# Altium PCB PCB1.PcbDoc
Units mil, origin at the board's own origin, x right, y up, seen from the top; angles counter-clockwise.
Board outline 3865 x 2015 mil, 2 copper layers (Top Layer, Bottom Layer); 19 components, 16 nets, 53 pads, 0 vias.
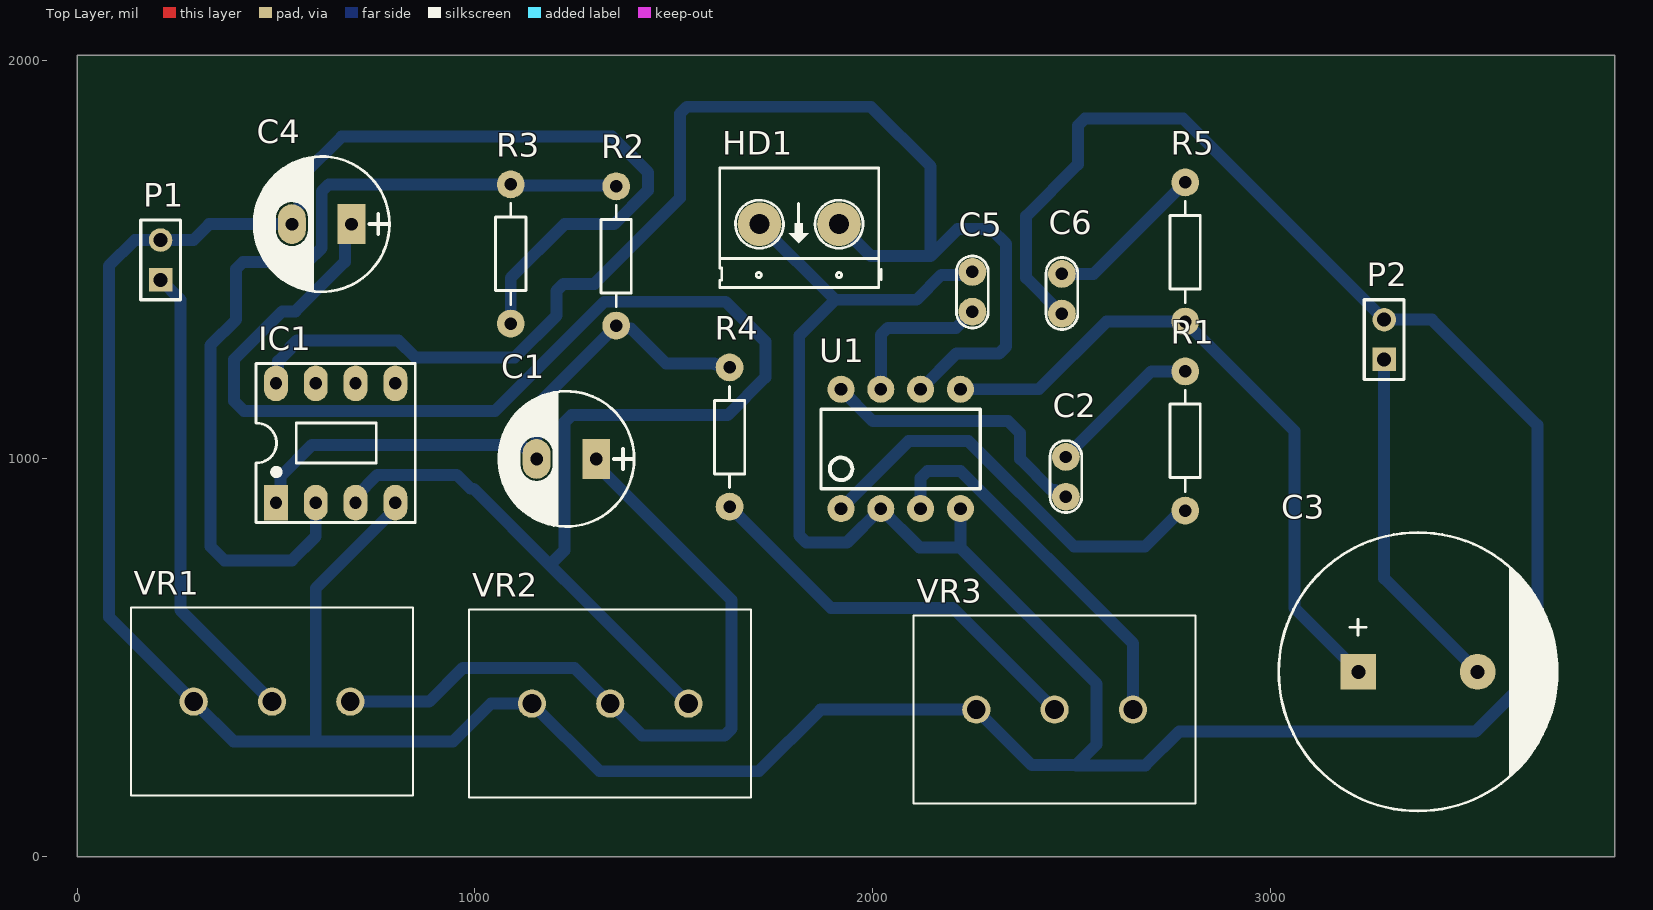
[diagram p0: Top Layer view]
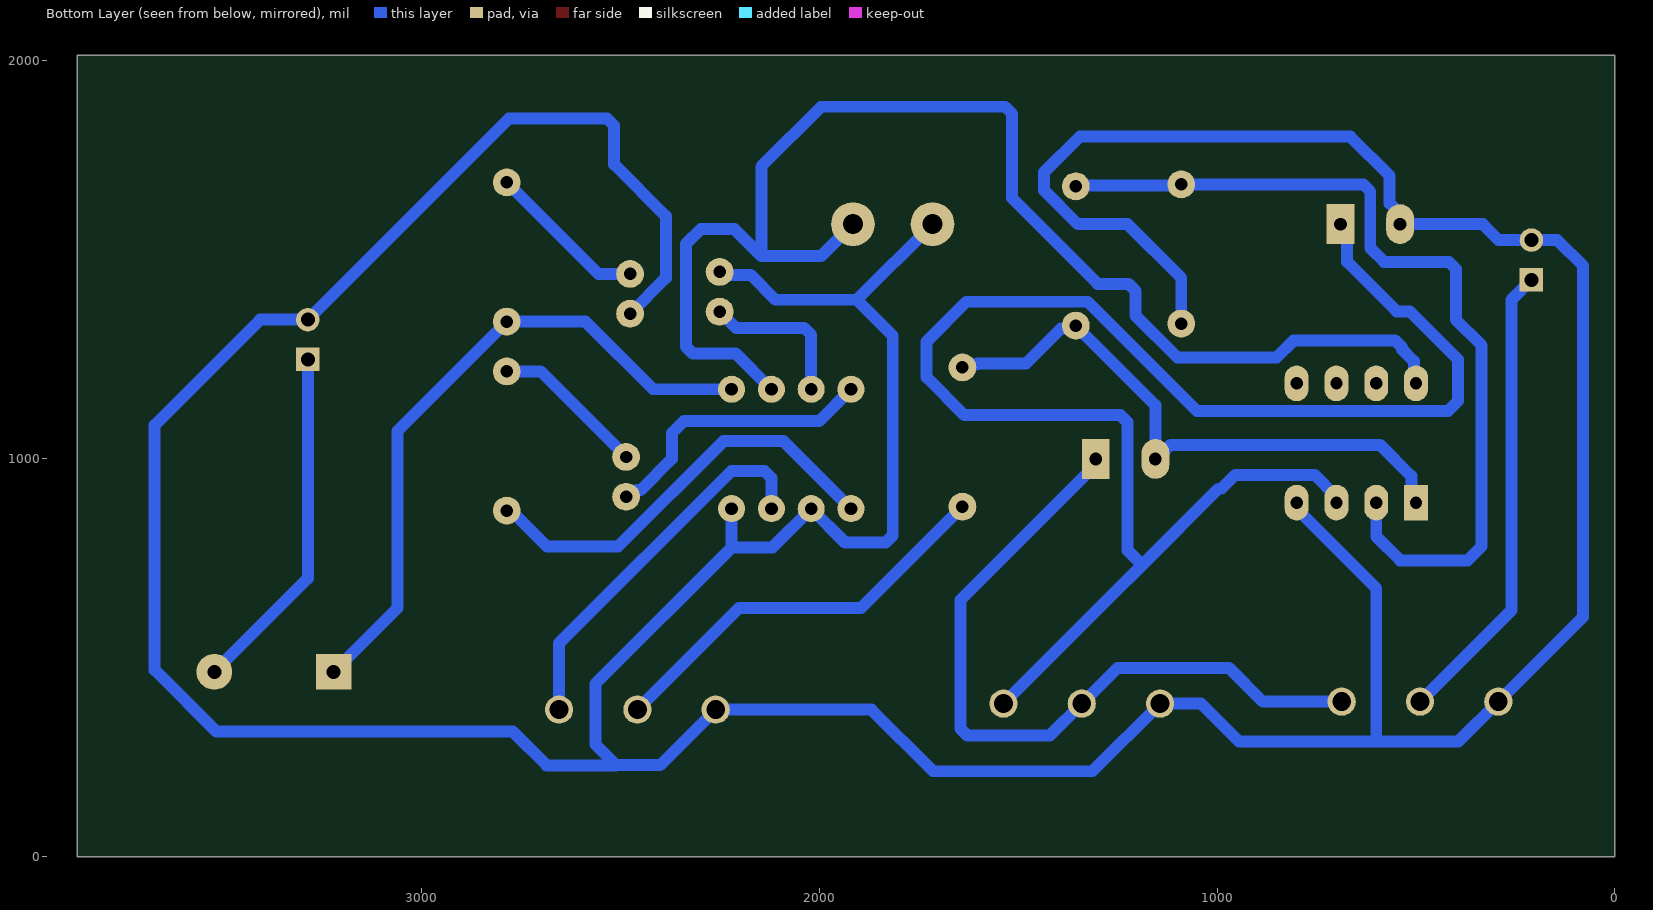
[diagram p1: Bottom Layer view, seen from below]
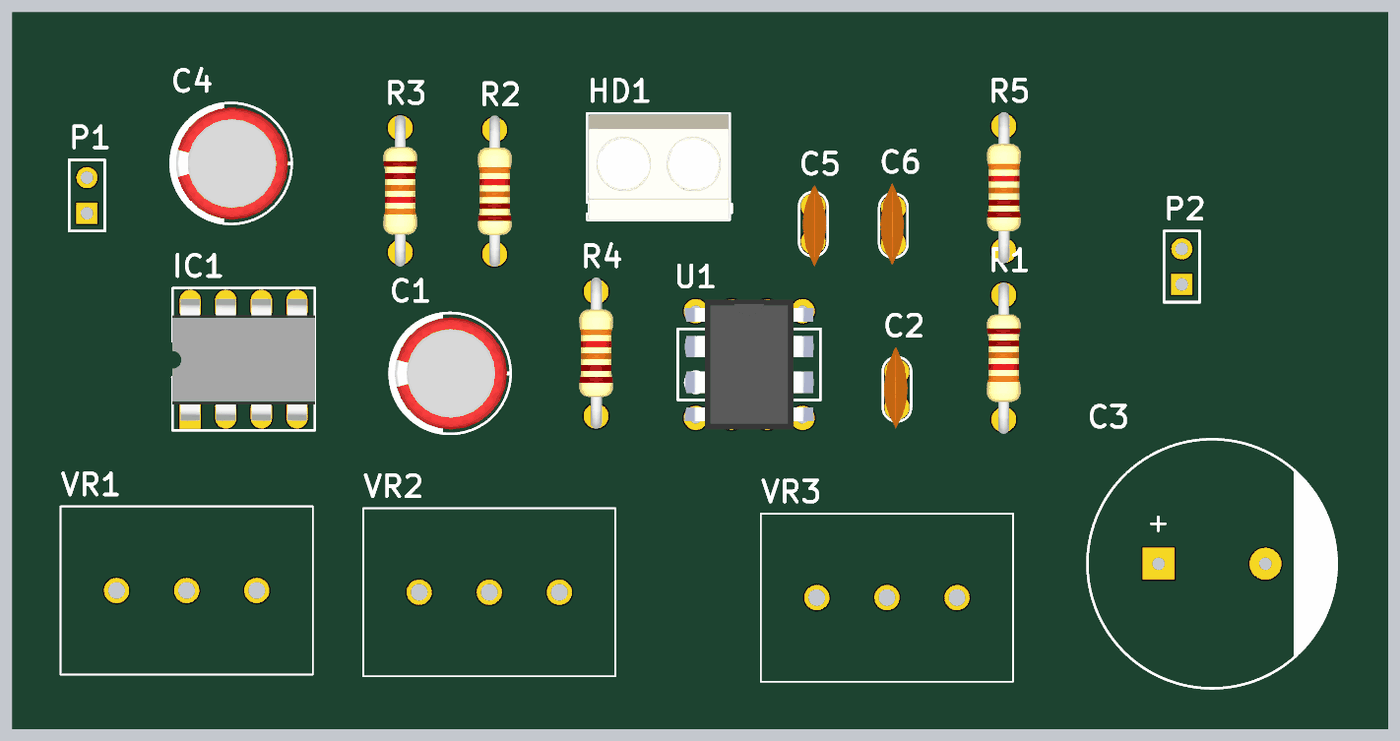
[diagram p2: 3D render of the assembled board from above, using the file's embedded part models]

## Layer stack, top to bottom
Top Solder: solder mask 0.4, Solder Resist, Dk 3.5
Top Layer: signal copper 1.4
Dielectric 1: dielectric 12.6, FR-4, Dk 4.8
Bottom Layer: signal copper 1.4
Bottom Solder: solder mask 0.4, Solder Resist, Dk 3.5

## Board outline
0,0 3865,0 3865,2015 0,2015

## Design rules (kind name [scope] priority, off if disabled: settings)
Clearance [All] p1: gap=10 ignorepadtopadclearanceinfootprint=FALSE except(0: Arc-Hole Track-Hole SMDPad-Hole THPad-Hole Via-Hole Fill-Hole Poly-Hole Region-Hole Text-Hole)
PolygonConnect [All] p1: connectstyle=Relief reliefconductorwidth=10 reliefentries=4 polygonreliefangle="90 Angle" airgapwidth=10
RoutingVias [All] p1: holewidth=28 width=50 viastyle="Through Hole" minholewidth=28 minwidth=50 maxholewidth=28 maxwidth=50
SolderMaskExpansion [All] p1: expansion=4 istentingtop=FALSE
Width Width_1 [All] p1: maxlimit=30 minlimit=10 preferedwidth=30 toplayer_maxwidth=10 toplayer_prefwidth=10 bottomlayer_minwidth=30 minimp=50.000000 maximp=50.000000 favimp=50.000000
30 further rules are at their usual default settings.

## Components (designator, comment, footprint, x,y, rotation, side; value= is the part's Value field where it differs from the comment)
C1 "1000uF/16V" CP1.5/3.4 1305,1000 r180 top
C2 "100pF" CN1 2485,905 r90 top
C3 "4700uF/16V" CP3/7 3220,465 r0 top value=2200uF/16V
C4 "1000uF/16V" CP1.5/3.4 690,1590 r180 top
C5 "100pF" CN1 2250,1470 r270 top
C6 "100pF" CN1 2475,1365 r90 top
HD1 "Header 2" HED2 1915,1590 r180 top
IC1 "LM358" DIP8/W0.3 500,890 r0 top
P1 "Header 2" HDR1X2 210,1450 r90 top
P2 "Header 2" HDR1X2 3285,1250 r90 top
R1 "1k" R1/4W 2785,870 r90 top value="R1/4W - 1K"
R2 "1k" R1/4W 1355,1685 r270 top value="R1/4W - 1K"
R3 "1k" R1/4W 1090,1340 r90 top value="R1/4W - 1K"
R4 "1k" R1/4W 1640,1230 r270 top value="R1/4W - 1K"
R5 "1k" R1/4W 2785,1695 r270 top value="R1/4W - 1K"
U1 "LM386_1" lm386 2070,1025 r0 top
VR1 "Respot" Respot 490,390 r180 top
VR2 "Respot" Respot 1340,385 r180 top
VR3 "Respot" Respot 2456.85,370 r180 top

## Footprints (in the part's own frame and the unit in brackets; to place one, negate y for a bottom-side part, rotate by r counter-clockwise, add the part's x,y. Pads: shape width x height; smd on the part's side, far side on the other; paste and mask are expansions set on the pad)
CN1 [mil]
  round 70 hole 31: 1(0,0) 2(100,0)
  silkscreen extent -40,-40 141,40, body extent -60,-30 170,37, height 265
CP1.5/3.4 [mil] "Tu hoa 220->470uF,16V, 470uF/16V,25V"
  rect 70x100 hole 32: 1(0,0)
  oval 70x100 hole 32: 2(150,0)
  silkscreen extent -95,-170 245,170, body extent -85,-157 230,157, height 446
CP3/7 [mil] "Tu hoa 47uF/450V"
  rect 90x90 hole 35: 1(0,0)
  round 90 hole 35: 2(300,0)
  silkscreen extent -200,-350 500,350, body extent -198,-350 499,348, height 945
DIP8/W0.3 [mil] "8 PIN, W 300mil, Pin to pin 100mil"
  rect 60x90 hole 31: 1(0,0)
  oval 60x90 hole 31: 2(100,0) 3(200,0) 4(300,0) 5(300,300) 6(200,300) 7(100,300) 8(0,300)
  silkscreen extent -50,-50 350,350, body extent -50,-40 350,336, height 201
HDR1X2 [mm] "Connector; Header; 2 Position"
  rect 1.5x1.5 hole 0.9: 1(0,0)
  round 1.5 hole 0.9: 2(2.54,0)
  silkscreen extent -1.27,-1.27 3.81,1.27, body extent -1.27,-1.27 3.81,1.27, height 7
HED2 [mil] "Header 2, 2 pin, hight 300mil, Pin to Pin 200, Colour Green"
  round 110 hole 50: 1(0,0) 2(200,0)
  silkscreen extent -106,-141 300,159, body extent -98,-136 296,159, height 394
lm386 [mil]
  round 68 hole 32: 1(-150,-150) 2(-50,-150) 3(50,-150) 4(150,-150) 5(150,150) 6(50,150) 7(-50,150) 8(-150,150)
  silkscreen extent -200,-100 200,100, body extent -215,-182 215,182, height 210
R1/4W [mil] "R 1/4W, 2 Pin, 350mil"
  round 70 hole 31: 1(0,0) 2(350,0)
  silkscreen extent 48,-38 302,38, body extent -40,-47 386,47, height 111
Respot [mm]
  round 1.8 hole 1.2: 1(-5,0) 2(0,0) 3(5,0)
  silkscreen extent -9,-6 9,6

## Part data
C1 C4: library part CP4, "Cap 1000uF/16V - 220uF/50V", Description 1="2200uF-3300uF/6,3V - 1000uF-2200uF/10V", Description 2="1000uF/16V - 470uF => 1000uF/25V - 100uF/100V", Description 3=330uF>470uF/35V_220uF>470uF/50V_10uF>22uF/250V, Description 4="220uF => 330uF/63V - 10uF =>33uF/160 - 200V", Description 5="4,7uF>10uF/250V_3,3uF>10uF/400V - 2,2uF>4,7uF/450V"
C2 C5 C6: library part CAP, "Cap np  1pF - 472pF"
C3: library part CP6, "Cap 4700uF/16V - 2200uF/50V", Description 1="10KuF=>22KuF/6,3V - 6800uF=>15KuF/10V", Description 2="4700uF=>10KuF/16V - 3300uF => 6800uF/25V", Description 3=2200uF=>3300uF/50V_1KuF=>2200uF/63V, Description 4="470uF => 1KuF/100V - 220uF-470uF/160V", Description 5="100uF=>220uF/200V -100uF=>330uF/350V", Description 6="33uF=>100/350V-400V  -  22uF=>33uF/450V"
HD1: library part Hed2, "Header 2 (Green)"
IC1: "Low-Power Dual Operational Amplifier"
P1 P2: "Header, 2-Pin", LatestRevisionDate=17-Jul-2002, LatestRevisionNote="Re-released for DXP Platform.", Publisher="Altium Limited"
R1 R2 R3 R4 R5: library part RES, "Resistor 1/4W"
U1: "low voltage audio power amplifier", Package=None, Availability=Unavailable, MP=LM386, Price=None
VR1 VR2 VR3: "500k Ohm 1 Gang Linear Panel Mount Potentiometer None 1 Turn Conductive Plastic 0.2W, 1/5W PC Pins", Package=None, Digi-Key_Part_Number=987-1304-ND, Digi-Key_Purchase_URL=https://www.digikey.cz/product-detail/en/tt-electronics-bi/P160KN-0QC15B500K/987-1304-ND/2408881?utm_source=snapeda&utm_medium=aggregator&utm_campaign=symbol, MF="TT Electronics/BI", MP=P160KN-0QC15B500K, SnapEDA_Link=https://www.snapeda.com/parts/P160KN-0QC15B500K/TT%20Electronics/BI/view-part/903272/?ref=snap

## Nets (pads, with @x,y where several pads share a name; then routed paths per layer and width w, separated by ;. In a path a pad name is that pad's centre, name@x,y a point inside that pad or via, vN(x,y) a via of type N, cw(c..) or ccw(c..) an arc to the next point about the centre after c; other vN are vias at no path point)
GND: C4.2 C5.1 C6.1 HD1.2 IC1.4 P1.2 P2.2 R3.1 U1.2 U1.4 VR1.3 VR2.3 VR3.3 | length 13023.5
  Bottom Layer w30: IC1.4 800,875 600,675 600,290 ; R3.1 1090,1455 1225,1590 1350,1590 1435,1675 1435,1720 1345,1810 665,1810 566.27,1711.27 566.27,1642.09 540,1615.82 C4.2 332.19,1590 292.19,1550 145,1550 80,1485 80,603.15 VR1.3 393.15,290 600,290 ; HD1.2 1905,1400 ; U1.4 2220,777.43 ; C5.1 2242.35,1462.35 2172.35,1462.35 2110,1400 1905,1400 ; C6.1 2385,1455 2385,1610 2515,1740 2515,1837.43 2532.57,1855 2780,1855 P2.2 3405,1350 3670,1085 3670,470 3515,315 2769.99,315 2684.99,230 2510,230 2562.57,282.57 2562.57,434.86 2220,777.43 ; 2510.43,230.43 2399.57,230.43 VR3.3 1868.69,370 1713.69,215 1313.15,215 VR2.3 1040,385 945,290 600,290 ; 1905,1400 1815,1310 1815,807.57 1832.57,790 1935,790 U1.2 2117.57,777.43 2220,777.43
NetC1_1: C1.1 VR1.1 VR2.2 | length 1889.3
  Bottom Layer w30: VR1.1 885,390 970,475 1250,475 VR2.2 1420,305 1627.43,305 1645,322.57 1645,645 1305,985 C1.1
NetC1_2: C1.2 IC1.1 R2.2 R4.1 | length 1510.6
  Bottom Layer w30: IC1.1 511.82,901.82 511.82,956.82 590,1035 1117.43,1035 1129.77,1022.65 1136.52,1022.65 1155,1004.18 C1.2 1155,1135 R2.2 1362.65,1327.35 1392.65,1327.35 1480,1240 1602.43,1240 1604.77,1237.65 1632.35,1237.65 R4.1
NetC2_1: C2.1 U1.8 | length 714.9
  Bottom Layer w30: U1.8 2000,1095 2340,1095 2370,1065 2370,1000 2448.43,921.57 2457.61,921.57 2474.18,905 C2.1
NetC2_2: C2.2 R1.2 | length 389.1
  Bottom Layer w30: C2.2 2700,1220 R1.2
NetC3_1: C3.1 R5.2 U1.5 | length 1695.6
  Bottom Layer w30: U1.5 2417.23,1175 2587.23,1345 R5.2 3060,1070 3060,625 C3.1
NetC3_2: C3.2 P2.1 | length 882.3
  Bottom Layer w30: P2.1 3285,700 C3.2
NetC4_1: C4.1 IC1.3 VR2.1 | length 4215.9
  Bottom Layer w30: C4.1 673.14,1573.14 673.14,1495 548.92,1370.78 515.78,1370.78 395,1250 395,1145 420,1120 1050,1120 1325,1395 1630,1395 1730,1295 1730,1205 1635,1110 1242.57,1110 1225,1092.43 1225,770 1188.43,733.43 ; IC1.3 700,905 755,960 953.99,960 988.99,925 996.85,925 1188.43,733.43 ; VR2.1 1266.85,655 1188.43,733.43
NetC5_2: C5.2 U1.7 | length 390.9
  Bottom Layer w30: U1.7 2020,1311.78 2037.57,1329.35 2209.35,1329.35 C5.2
NetC6_2: C6.2 R5.1 | length 405.3
  Bottom Layer w30: C6.2 2555,1465 R5.1
NetHD1_1: HD1.1 IC1.8 U1.6 | length 3462.4
  Bottom Layer w30: IC1.8 505.53,1195.53 505.53,1245.53 535,1275 535,1280 552.57,1297.57 807.43,1297.57 850,1255 1100,1255 1205,1360 1205,1422.43 1222.57,1440 1300,1440 1515,1655 1515,1867.43 1532.57,1885 1995,1885 2145,1735 2145,1509.85 ; HD1.1 1995.15,1509.85 2145,1509.85 ; U1.6 2210,1265 2317.43,1265 2335,1282.57 2335,1540 2297.5,1577.5 2212.65,1577.5 2145,1509.85
NetIC1_2: IC1.2 R2.1 R3.2 | length 2242.3
  Bottom Layer w30: IC1.2 600,805 540,745 370,745 335,780 335,1285.15 400,1350.15 400,1477.43 417.57,1495 580,1495 615,1530 615,1672.43 632.57,1690 R3.2 1092.5,1687.5 1352.5,1687.5 R2.1
NetP1_1: P1.1 VR1.2 | length 1176
  Bottom Layer w30: P1.1 260,1400 260,620 VR1.2
NetR1_1: R1.1 U1.1 | length 1082.5
  Bottom Layer w30: U1.1 2090,1045 2240,1045 2505,780 2684.18,780 2774.18,870 R1.1
NetR4_2: R4.2 VR3.2 | length 1028.1
  Bottom Layer w30: R4.2 1894.92,625.08 2201.77,625.08 VR3.2
NetU1_3: U1.3 VR3.1 | length 964.5
  Bottom Layer w30: U1.3 2120,952.5 2137.57,970.07 2219.93,970.07 2653.7,536.3 VR3.1
pads on no net: IC1.5 IC1.6 IC1.7